# Altium PCB AdaptiveLightingHub.PcbDoc
Units mil, origin at the board's own origin, x right, y up, seen from the top; angles counter-clockwise.
Board outline 1759.84 x 1515.75 mil, 2 copper layers (Top Layer, Bottom Layer); 34 components, 26 nets, 167 pads, 148 vias.
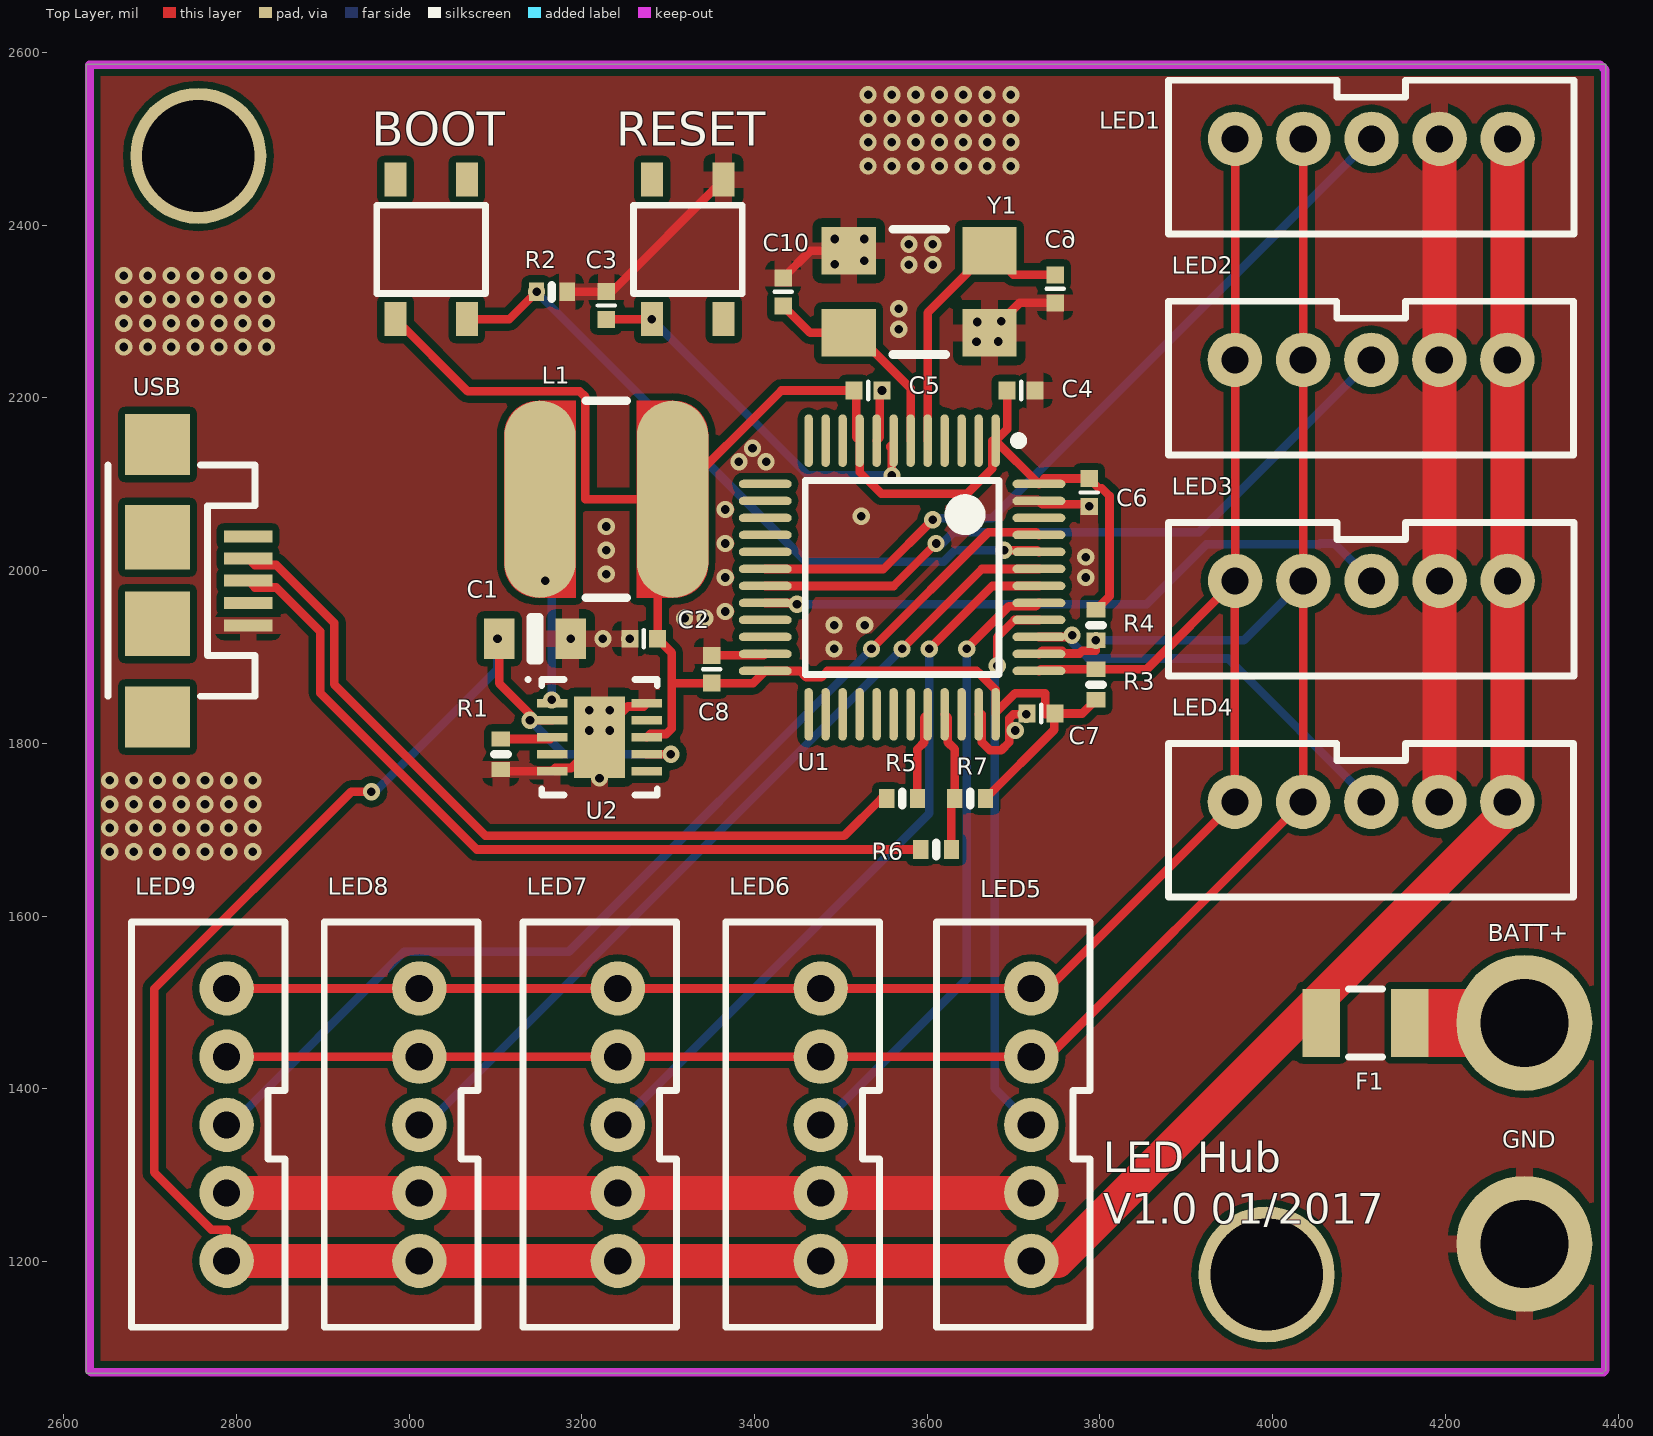
[diagram p0: Top Layer view]
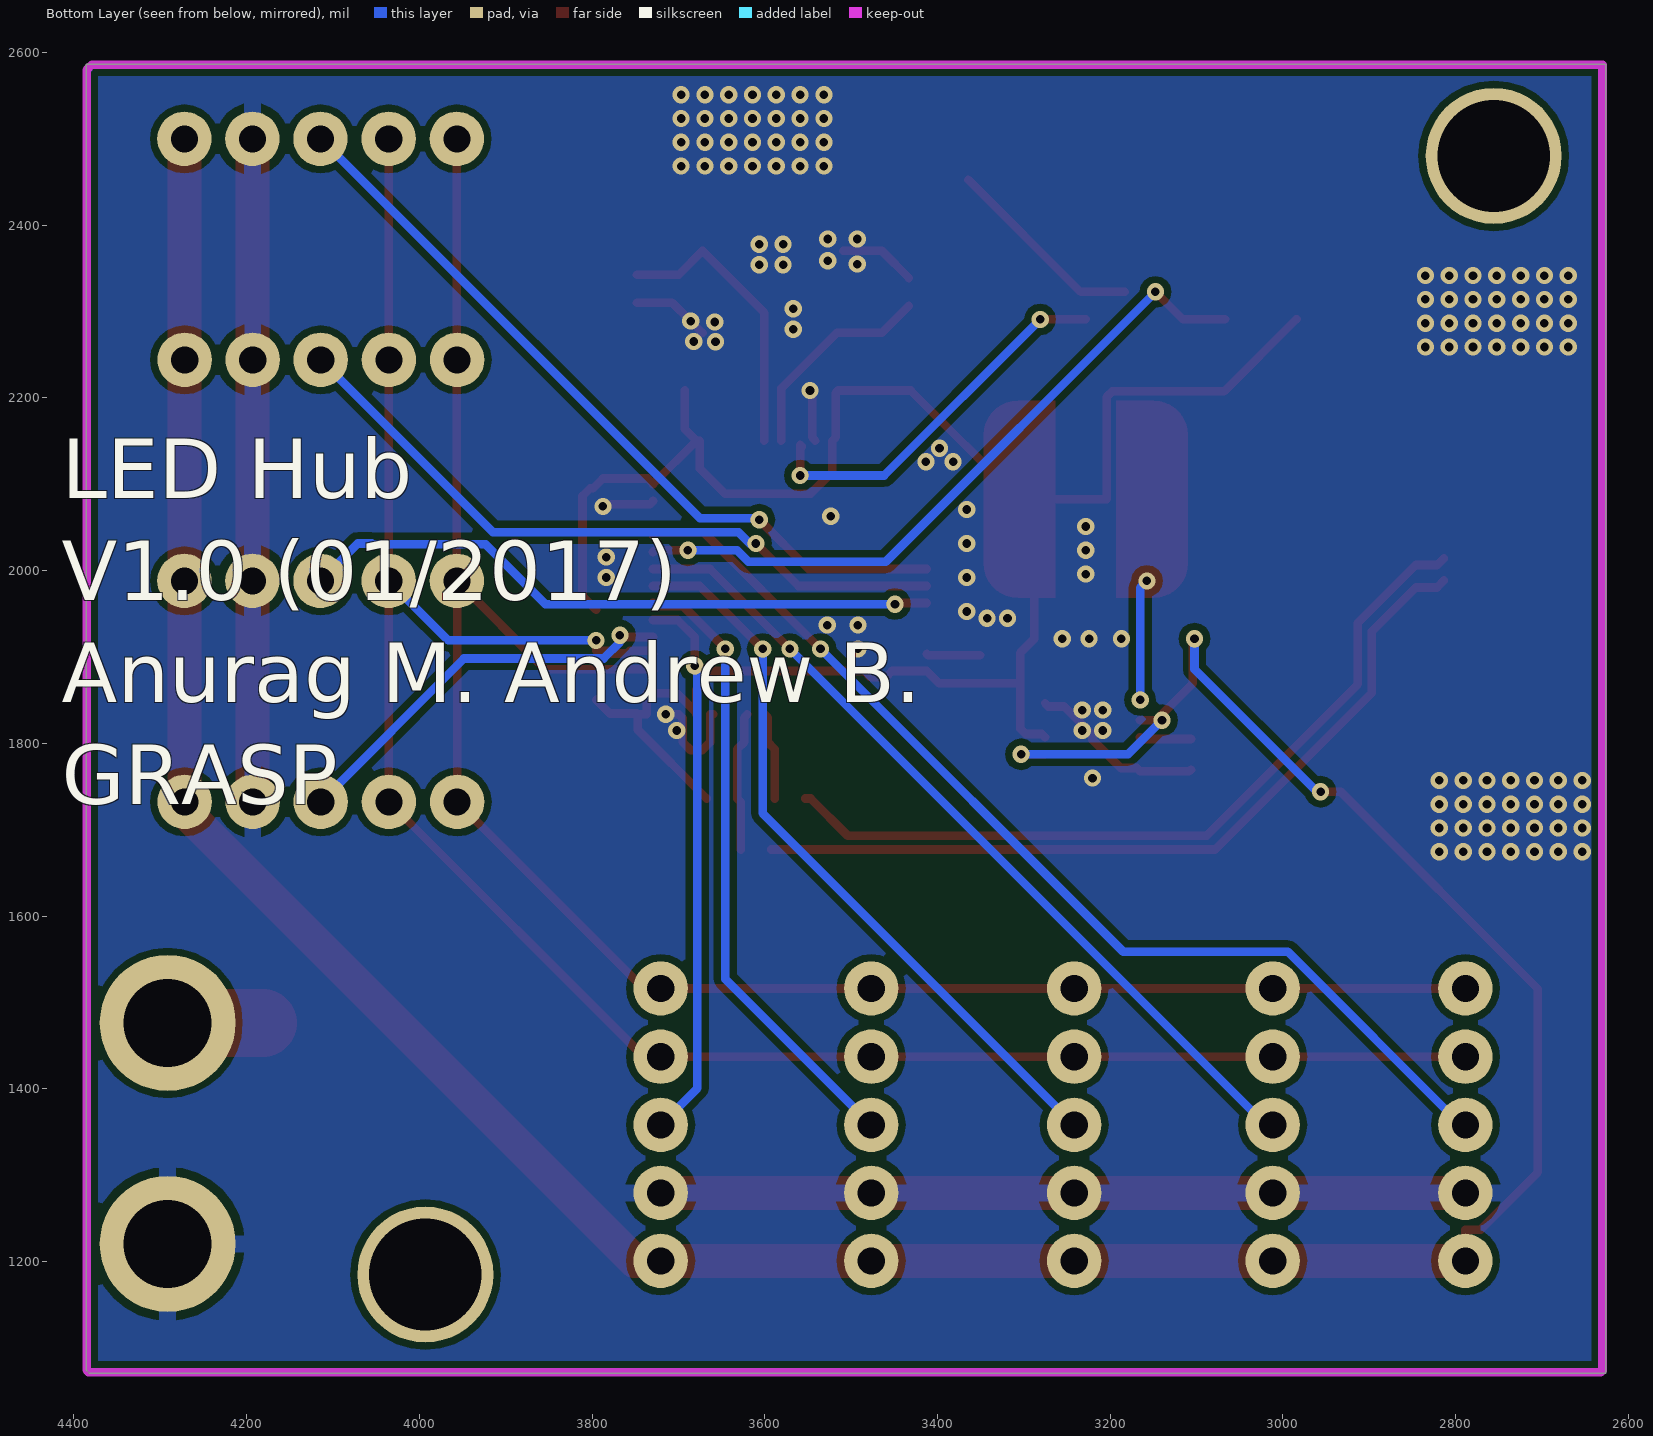
[diagram p1: Bottom Layer view, seen from below]
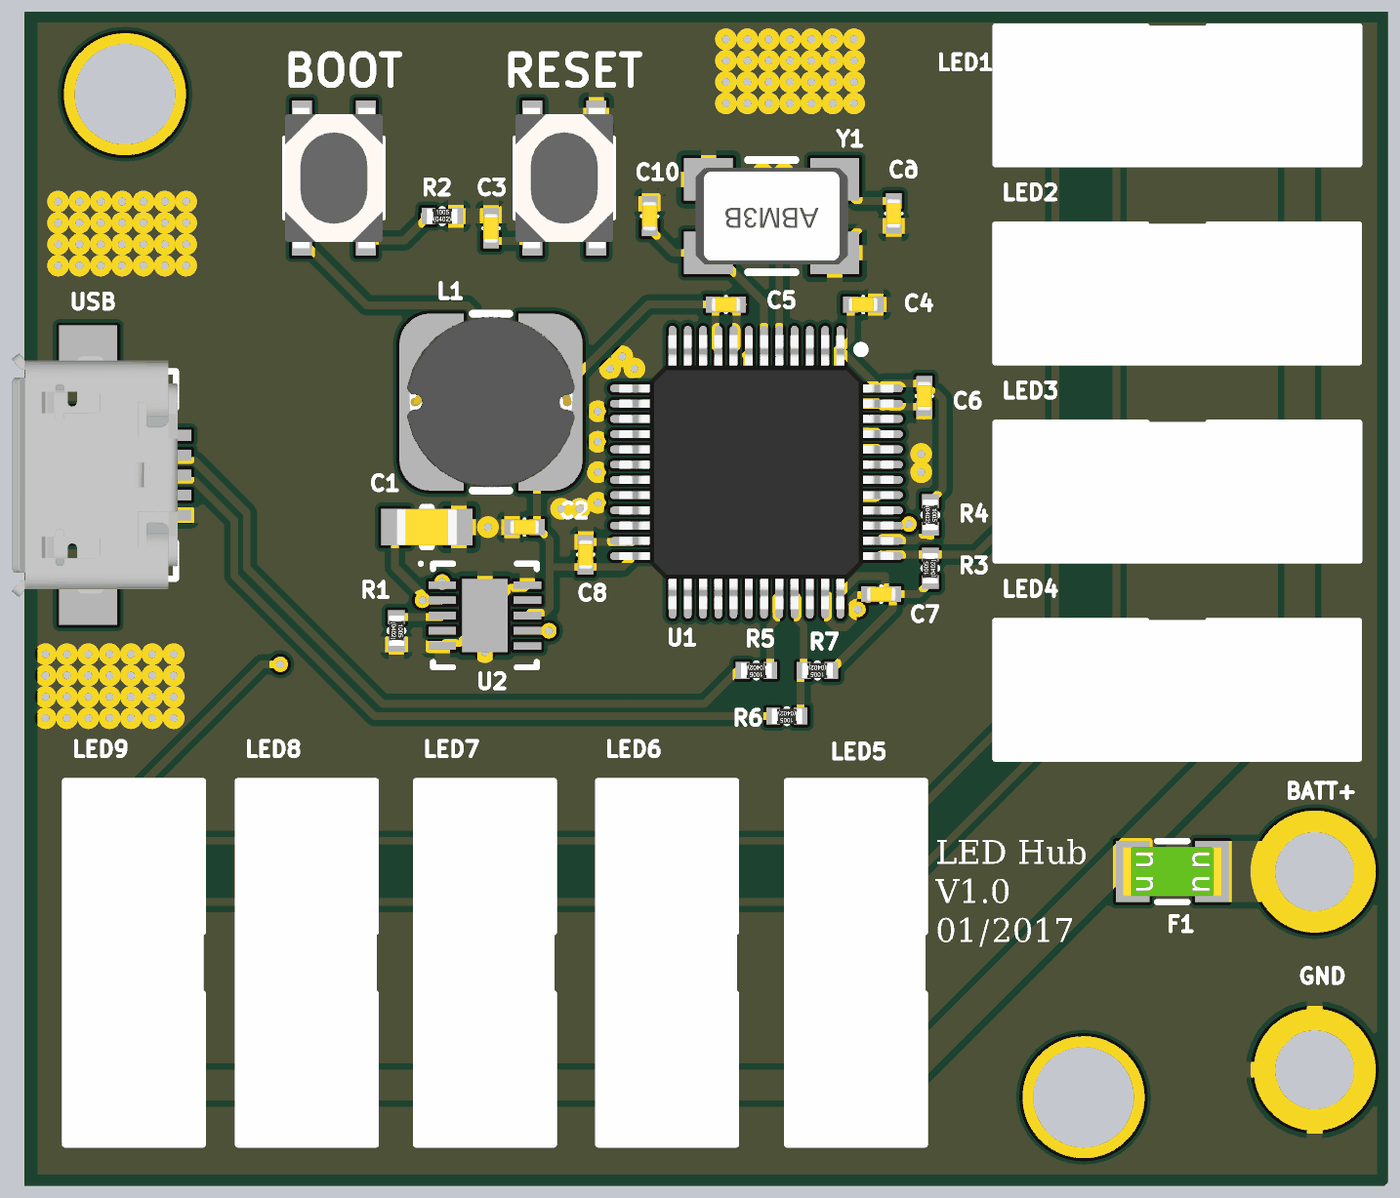
[diagram p2: 3D render of the assembled board from above, using the file's embedded part models]

## Layer stack, top to bottom
Top Solder: solder mask 0.4, Solder Resist, Dk 3.5
Top Layer: signal copper 1.4
Dielectric 1: dielectric 12.6, FR-4, Dk 4.8
Bottom Layer: signal copper 1.4
Bottom Solder: solder mask 0.4, Solder Resist, Dk 3.5

## Board outline
2625.98,2586.61 4385.83,2586.61 4385.83,1074.8 4381.89,1070.87 2625.98,1070.87

## Design rules (kind name [scope] priority, off if disabled: settings)
Clearance [All] p1: gap=6 ignorepadtopadclearanceinfootprint=FALSE
PolygonConnect PolygonConnect_1 [IsVia] p1: connectstyle=Direct reliefconductorwidth=10 reliefentries=4 polygonreliefangle="90 Angle" airgapwidth=10
PolygonConnect [All] p2: connectstyle=Relief reliefconductorwidth=20 reliefentries=4 polygonreliefangle="90 Angle" airgapwidth=10
RoutingVias [All] p1: holewidth=10 width=20 viastyle="Through Hole" minholewidth=10 minwidth=20 maxholewidth=10 maxwidth=20
SolderMaskExpansion SolderMaskExpansion_1 [IsVia] p1: expansion=1 soldermaskfromhole=TRUE
SolderMaskExpansion [All] p2: expansion=4
Width Width_BATT+ [InNet('BATT+')] p1: maxlimit=39.37 minlimit=10 preferedwidth=10
Width Width_1 [All] p2: maxlimit=78.74 minlimit=10 preferedwidth=10
30 further rules are at their usual default settings.

## Components (designator, comment, footprint, x,y, rotation, side; value= is the part's Value field where it differs from the comment)
BOOT "" SWITCH 3025.59,2372.05 r270 top
C1 "1uF" C0805[2012X120] 3145.67,1921.26 r180 top
C2 "10uF 6.3V 0402" C0402[1005X55] 3271.65,1921.26 r0 top value=10uF
C3 "0.1uF 6.3V 0402" C0402[1005X55] 3228.35,2307.09 r90 top value=0.1uF
C4 "4.7uF 6.3V 0402" C0402[1005X55] 3708.66,2208.66 r180 top value=4.7uF
C5 "2.2uF 6.3V 0402" C0402[1005X55] 3531.5,2208.66 r180 top value=2.2uF
C6 "2.2uF 6.3V 0402" C0402[1005X55] 3787.4,2090.55 r90 top value=2.2uF
C7 "2.2uF 6.3V 0402" C0402[1005X55] 3731.89,1834.65 r0 top value=2.2uF
C8 "2.2uF 6.3V 0402" C0402[1005X55] 3350.39,1885.83 r270 top value=2.2uF
C9 "15pF 50V 0402" C0402[1005X55] 3748.03,2326.38 r90 top value=15pF
C10 "15pF 50V 0402" C0402[1005X55] 3433.07,2322.83 r270 top value=15pF
F1 "FUSE 1206" 1206_FUSE 4107.5,1476.38 r180 top
L1 "SDR0604-470KL" SDR0604 3228.35,2082.68 r0 top value=47uH
LED1 "JST_PH_5_VERT" JST-PH-5-PTH-VERT 4114.43,2500 r180 top (schematic designator JP1)
LED2 "JST_PH_5_VERT" JST-PH-5-PTH-VERT 4114.17,2244.09 r180 top (schematic designator JP2)
LED3 "JST_PH_5_VERT" JST-PH-5-PTH-VERT 4114.43,1988.19 r180 top (schematic designator JP3)
LED4 "JST_PH_5_VERT" JST-PH-5-PTH-VERT 4114.17,1732.28 r180 top (schematic designator JP4)
LED5 "JST_PH_5_VERT" JST-PH-5-PTH-VERT 3720.47,1358.27 r90 top (schematic designator JP5)
LED6 "JST_PH_5_VERT" JST-PH-5-PTH-VERT 3476.69,1358.27 r90 top (schematic designator JP6)
LED7 "JST_PH_5_VERT" JST-PH-5-PTH-VERT 3241.69,1358.27 r90 top (schematic designator JP7)
LED8 "JST_PH_5_VERT" JST-PH-5-PTH-VERT 3011.81,1358.27 r90 top (schematic designator JP8)
LED9 "JST_PH_5_VERT" JST-PH-5-PTH-VERT 2788.64,1358.27 r90 top (schematic designator JP9)
R1 "56K2 1% 0402" R0402[1005] 3106.3,1787.4 r270 top value=56K2
R2 "10K 1% 0402" R0402[1005] 3165.35,2322.83 r0 top value=10K
R3 "2K2 1% 0402" R0402[1005] 3795.28,1868.11 r90 top value=2K2
R4 "2K2 1% 0402" R0402[1005] 3795.28,1937.01 r270 top value=2K2
R5 "22R 1% 0402" R0402[1005] 3570.87,1736.22 r180 top value=22R
R6 "22R 1% 0402" R0402[1005] 3610.24,1677.17 r180 top value=22R
R7 "1K5 1% 0402" R0402[1005] 3649.61,1736.22 r180 top value=1K5
RESET "" SWITCH 3322.83,2372.05 r90 top
U1 "STM32F303CBT6" LQFP-48 3570.87,1992.13 r270 top
U2 "LM5165YDRCR" "VSON-10 (3mmx3mm)" 3220.47,1807.09 r0 top
USB "USB" USB-MICROB 2708.66,1988.6 r270 top (schematic designator JP10)
Y1 "8MHz, 10pF" ABRA-ABM3B-4_V 3590.55,2322.83 r180 top

## Footprints (in the part's own frame and the unit in brackets; to place one, negate y for a bottom-side part, rotate by r counter-clockwise, add the part's x,y. Pads: shape width x height; smd on the part's side, far side on the other; paste and mask are expansions set on the pad)
1206_FUSE [mm]
  rect 1.1x2 smd: 1(-1.3,0) 2(1.3,0)
  silkscreen extent -0.5,-1 0.5,1, body extent -1.61,-0.8 1.61,0.8, height 0.67
ABRA-ABM3B-4_V [mil] "SMT Crystal, 4-Leads, Body 5.2x3.4mm"
  rect 63x55 smd: 1(-81.5,-47.5) 2(-81.5,47.5) 2(81.5,-47.5) 3(81.5,47.5)
  silkscreen extent -31,-72 31,73, body extent -98,-62 98,63, height 43
C0402[1005X55] [mm] "Chip Capacitor, Body 1.0x0.5mm"
  rect 0.5x0.52 smd: 1(-0.41,0) 2(0.41,0)
  silkscreen extent 0,-0.25 0,0.25, body extent -0.5,-0.25 0.5,0.25, height 0.56
C0805[2012X120] [mm] "Chip Capacitor, Body 2.0x1.25mm"
  rect 0.9x1.2 smd: 1(-1.05,0) 2(1.05,0)
  silkscreen extent -0.13,-0.63 0.13,0.64, body extent -1,-0.6 1,0.6, height 1.21
JST-PH-5-PTH-VERT [mil]
  round 63 hole 31.5: 1(-157.48,0) 2(-78.74,0) 3(0,0) 4(79,0) 5(158,0)
  silkscreen extent -234,-68 235,110, body extent -236,-69 232,108, height 236
LQFP-48 [mm] "QFP, 48-Leads, Body 7x7mm, Pitch 0.5mm, IPC High Density"
  oval 1.55x0.25 smd: 1(-4.025,2.75) 2(-4.025,2.25) 3(-4.025,1.75) 4(-4.025,1.25) 5(-4.025,0.75) 6(-4.025,0.25) 7(-4.025,-0.25) 8(-4.025,-0.75) 9(-4.025,-1.25) 10(-4.025,-1.75) 11(-4.025,-2.25) 12(-4.025,-2.75) 25(4.025,-2.75) 26(4.025,-2.25) 27(4.025,-1.75) 28(4.025,-1.25) 29(4.025,-0.75) 30(4.025,-0.25) 31(4.025,0.25) 32(4.025,0.75) 33(4.025,1.25) 34(4.025,1.75) 35(4.025,2.25) 36(4.025,2.75)
  oval 0.25x1.55 smd: 13(-2.75,-4.025) 14(-2.25,-4.025) 15(-1.75,-4.025) 16(-1.25,-4.025) 17(-0.75,-4.025) 18(-0.25,-4.025) 19(0.25,-4.025) 20(0.75,-4.025) 21(1.25,-4.025) 22(1.75,-4.025) 23(2.25,-4.025) 24(2.75,-4.025) 37(2.75,4.025) 38(2.25,4.025) 39(1.75,4.025) 40(1.25,4.025) 41(0.75,4.025) 42(0.25,4.025) 43(-0.25,4.025) 44(-0.75,4.025) 45(-1.25,4.025) 46(-1.75,4.025) 47(-2.25,4.025) 48(-2.75,4.025)
  silkscreen extent -4.15,-2.85 2.85,3.55, body extent -4.5,-4.5 4.5,4.5, height 1.6
R0402[1005] [mm] "Chip Resistor, Body 1.0x0.5mm"
  rect 0.45x0.55 smd: 1(-0.45,0) 2(0.45,0)
  silkscreen extent 0,-0.2 0,0.2, body extent -0.5,-0.25 0.5,0.25, height 0.35
SDR0604 [mm]
  rrect100% 2.1x5.8 smd: 1(-1.95,0) 2(1.95,0)
  Top Layer region: -2,2.9 -0.9,2.9 -0.9,-2.9 -2,-2.9 -2.5,-2.766 -2.866,-2.4 -3,-1.9 -3,-1.9 -3,1.9 -2.866,2.4 -2.5,2.766 -2,2.9
  Top Layer region: 2,2.9 0.9,2.9 0.9,-2.9 2,-2.9 2.5,-2.766 2.866,-2.4 3,-1.9 3,-1.9 3,1.9 2.866,2.4 2.5,2.766 2,2.9
  silkscreen extent -0.6,-2.9 0.6,2.9, body extent -2.75,-2.8 2.75,2.8, height 4.55
SWITCH [mm]
  rect 1x0.65 smd: 1(-2.05,1.05) 2(2.05,1.05) 3(-2.05,-1.05) 4(2.05,-1.05)
  silkscreen extent -1.3,-1.6 1.3,1.6, body extent -2.3,-1.6 2.3,1.6, height 2.5
USB-MICROB [mil]
  rect 14x56 smd: D+(0,105) D-(-25.59,105) GND(52,105) ID(26,105) VBUS(-51.18,105)
  rect 71x75 smd: MT1(-157.48,0) MT2(158,0)
  rect 75x75 smd: P$1(-50,0) P$2(50,0)
  silkscreen extent -134,-57 134,113, body extent -157,-98 157,115, height 112
"VSON-10 (3mmx3mm)" [mm] "VSON, 10-Leads, Body 3.00x3.00mm, Pitch 0.50mm, Thermal Pad 2.40x1.49mm, IPC Medium Density"
  rect 0.9x0.25 smd: 1(-1.395,1) 2(-1.395,0.5) 3(-1.395,0) 4(-1.395,-0.5) 5(-1.395,-1) 6(1.395,-1) 7(1.395,-0.5) 8(1.395,0) 9(1.395,0.5) 10(1.395,1)
  rect 1.49x2.4 smd: 11(0,0)
  silkscreen extent -2.15,-1.7 1.7,1.75, body extent -1.55,-1.55 1.55,1.55, height 1

## Part data
BOOT RESET: library part DIPT-DTSM-6, "Switch, SPNO Push Button SMD", Manufacturer="C&K Components", PartNumber="PTS810 SJM 250 SMTR LFS", ComponentLink1Description="Manufacturer URL", ComponentLink1URL=http://www.dip.com.tw/, ComponentLink2Description=Datasheet, ComponentLink2URL=http://www.dip.com.tw/Products_tact.htm, ComponentLink3Description="Package Specification", ComponentLink3URL=http://www.dip.com.tw/PDF/pro_tact/DTSM_G_-6_2_-V.pdf, Mechanical Life="200,000 cycles", Mounting Technology="Surface Mount", PackageDescription="Switch, Surface Mount, 4 Leads, Body 4.6x2.8mm, Height 1.9mm", PackageReference=PTS810, Packing Type=Tape&Reel
C1: library part CAP_1uF_100V_0805_20%, "CAP_1uF 100V 20% 0805 (2012 metric)", Manufacturer=TDK, Package Description="0805 (2012 Metric)", Package Reference=0805, PartNumber=C2012X7S2A474M125AE, Tolerance=20%, Voltage=100V, Mounting Technology="Surface Mount"
C2: library part CAP_10uF_6.3V_0402_20%, "10uF 6.3V 20% 0402 (1005 Metric)", Manufacturer=Murata, PartNumber=GRM155R60J106ME44D, Tolerance=20%, Voltage=6.3V, Mounting Technology="Surface Mount", PackageDescription="0402 (1005 Metric)", PackageReference=0402
C3: library part CAP_0.1uF_6.3V_0402_10%, "0.1uF 6.3V 10% 0402 (1005 Metric)", Manufacturer=Murata, PartNumber=GRM155R70J104KA01D, Tolerance=10%, Voltage=6.3V, Mounting Technology="Surface Mount", PackageDescription="0402 (1005 Metric)", PackageReference=0402
C4: library part CAP_4.7uF_6.3V_0402_20%, "4.7uF 6.3V 20% 0402 (1005 Metric)", Manufacturer=Murata, PartNumber=GRM155R60J475ME47D, Tolerance=20%, Voltage=6.3V, Mounting Technology="Surface Mount", PackageDescription="0402 (1005 Metric)", PackageReference=0402
C5 C6 C7 C8: library part CAP_2.2uF_6.3V_0402_20%, "2.2uF 6.3V 20% 0402 (1005 Metric)", Manufacturer=Murata, PartNumber=GRM155R60J225ME15D, Tolerance=20%, Voltage=6.3V, Mounting Technology="Surface Mount", PackageDescription="0402 (1005 Metric)", PackageReference=0402
C9 C10: library part CAP_15pF_50V_0402_5%, "15pF 50V 5% 0402 (1005 Metric)", Manufacturer=Murata, PartNumber=GRM1555C1H150JA01D, Tolerance=5%, Voltage=50V, Mounting Technology="Surface Mount", PackageDescription="0402 (1005 Metric)", PackageReference=0402
F1: "Surface Mount Fuses UST 1206 FUSE 25A F", Current=25A, Manufacturer=Schurter, PartNumber=3413.0332.22, Mounting Technology="Surface Mount", PackageDescription="1206 (3216 Metric)", PackageReference=1206
L1: "47uH 10% 0.72A 0604", Current=0.72A, Manufacturer=Bourns, Mounting Technology="Surface Mount", PackageReference=SDR0604, PartNumber=SDR0604-470KL
LED1 LED2 LED3 LED4 LED5 LED6 LED7 LED8 LED9: Manufacturer="JST Sales America, Inc.", PartNumber=B5B-PH-K-S(LF)(SN), Mounting Technology="Through Hole", PackageReference=JST-PH
R1: library part RES_56K2_0402_1%, "56K2 0.063W 1% 0402 (1005 Metric)", Manufacturer="KOA Speer", PartNumber=RK73H1ETTP5622F, Power=0.063W, Tolerance=1%, ComponentLink1Description=Datasheet, ComponentLink1URL=http://www.koaspeer.com/catimages/Products/RK73H/RK73H.pdf, Mounting Technology="Surface Mount", PackageDescription="0402 (1005 Metric)", PackageReference=0402
R2: library part RES_10K_0402_1%, "10K 0.063W 1% 0402 (1005 Metric)", Manufacturer="KOA Speer", PartNumber=RK73H1ETTP1002F, Power=0.063W, Tolerance=1%, ComponentLink1Description=Datasheet, ComponentLink1URL=http://www.koaspeer.com/catimages/Products/RK73H/RK73H.pdf, Mounting Technology="Surface Mount", PackageDescription="0402 (1005 Metric)", PackageReference=0402
R3 R4: library part RES_2K2_0402_1%, "2K2 0.063W 1% 0402 (1005 Metric)", Manufacturer="KOA Speer", PartNumber=RK73H1ETTP2201F, Power=0.063W, Tolerance=1%, ComponentLink1Description=Datasheet, ComponentLink1URL=http://www.koaspeer.com/catimages/Products/RK73H/RK73H.pdf, Mounting Technology="Surface Mount", PackageDescription="0402 (1005 Metric)", PackageReference=0402
R5 R6: library part RES_22R_0402_1%, "22R 0.063W 1% 0402 (1005 Metric)", Manufacturer="KOA Speer", PartNumber=RK73H1ETTP22R0F, Power=0.063W, Tolerance=1%, ComponentLink1Description=Datasheet, ComponentLink1URL=http://www.koaspeer.com/catimages/Products/RK73H/RK73H.pdf, Mounting Technology="Surface Mount", PackageDescription="0402 (1005 Metric)", PackageReference=0402
R7: library part RES_1K5_0402_1%, "1K5 0.063W 1% 0402 (1005 Metric)", Manufacturer="KOA Speer", PartNumber=RK73H1ETTP1501F, Power=0.063W, Tolerance=1%, ComponentLink1Description=Datasheet, ComponentLink1URL=http://www.koaspeer.com/catimages/Products/RK73H/RK73H.pdf, Mounting Technology="Surface Mount", PackageDescription="0402 (1005 Metric)", PackageReference=0402
U1: Manufacturer=STMicroelectronics, Mounting Technology="Surface Mount", PackageDescription="QFP, 48-Leads, Body 7x7mm, Pitch 0.5mm", PackageReference=LQFP-48, PartNumber=STM32F303CBT6
U2: "LM5165 3-V to 65-V Input, 150-mA Synchronous Buck Converter", Manufacturer="Texas Instruments", Mounting Technology="Surface Mount", PackageReference=VSON-10, PartNumber=LM5165YDRCR
USB: library part USB_MICROB_SMT, Manufacturer="Amphenol FCI", PartNumber=10118192-0001LF, Mounting Technology="Surface Mount", PackageReference="USB - Micro B"
Y1: library part ABRA-ABM3B-4, Manufacturer=ABRACON, PartNumber=ABM3B-8.000MHZ-10-1UT, Mounting Technology="Surface Mount", PackageDescription="2012 (5032 metric)", PackageReference=2012

## Free pads (board coordinates)
  round 157.48 hole 129.92: 2(2755.91,2480.32) 2(3993,1185)
  round 157.48 hole 101.97: 3(4291.34,1220.47) 3(4291.34,1476.38)

## Via types
v1: diameter 20, hole 10, Top Layer to Bottom Layer, 148 vias

## Nets (pads, with @x,y where several pads share a name; then routed paths per layer and width w, separated by ;. In a path a pad name is that pad's centre, name@x,y a point inside that pad or via, vN(x,y) a via of type N, cw(c..) or ccw(c..) an arc to the next point about the centre after c; other vN are vias at no path point)
3V3: BOOT.4 C2.2 C4.2 C5.2 C6.2 C7.2 C8.2 L1.2 R3.1 R4.1 R7.1 U1.1 U1.9 U1.24 U1.36 U1.48 U2.8 | length 2438.2
  Top Layer w10: BOOT.4 3067.74,2207.85 3197.47,2207.85 3203.91,2201.41 3203.91,2082.68 L1.2 ; U2.8 3279.16,1810.85 3297.67,1810.85 3304.11,1817.3 3304.11,1870.08 ; R7.1 3747.05,1815.95 C7.2@3747.05,1833.66 ; U1.36 U1.36@3679.13,1835.62 ; C4.2 3692.52,2163.98 U1.1 ; R4.1 3811.02,1970.47 3811.02,2086.42 3802.19,2095.25 3798.84,2095.25 C6.2 3735.63,2106.69 U1.48 U1.1 ; R3.1 3779.53,1834.65 C7.2 C7.2@3747.05,1833.66 ; 3304.11,1870.08 3304.11,1904.94 C2.2 3287.79,2065.35 L1.2 ; 3304.11,1870.08 3304.5,1869.69 C8.2 3398.23,1869.69 U1.24 3452.59,1883.86 3459.81,1876.64 3477.2,1876.64 3484.42,1883.86 3657.36,1883.86 3660.09,1881.12 3666.04,1875.17 3679.13,1862.08 U1.36@3679.13,1835.62 ; L1.2 3431.1,2208.66 C5.2 3517.89,2206.13 3517.89,2154.35 U1.9 3521.65,2114.17 3546.59,2089.24 3646.2,2089.24 3675.37,2118.4 3675.37,2150.59 U1.1 ; U1.36@3679.13,1835.62 3701.78,1858.27 3736.59,1858.27 3736.59,1833.66 C7.2@3747.05,1833.66
BATT+: C1.2 F1.2 LED1.1 LED2.1 LED3.1 LED4.1 LED5.1 LED6.1 LED7.1 LED8.1 LED9.1 U2.2 U2.7 | length 3765.7
  Top Layer w10: LED9.1 2788.64,1237.03 2771.04,1237.03 2704.72,1303.34 2704.72,1515.75 2933.07,1744.09 v1(2956.36,1744.09) ; C1.2 3104.33,1869.48 3139.97,1833.84 v1(3139.97,1826.77) U2.2@3165.55,1826.77 ; U2.7 v1(3303.14,1787.4)
  Top Layer w39.37: LED9.1 LED8.1 LED7.1 LED6.1 LED5.1 3750.79,1200.79 4271.91,1721.91 LED3.1 LED1.1
  Bottom Layer w10: v1(2956.36,1744.09) 2960.63,1744.09 3102.36,1885.83 v1(3102.36,1921.26) ; v1(3139.97,1826.77) 3179.34,1787.4 v1(3303.14,1787.4)
DM: R5.2 USB.D- | length 932
  Top Layer w10: USB.D- 2821.25,2006.6 2846.22,2006.6 2913.15,1939.67 2913.15,1868.39 3088.37,1693.17 3503.94,1693.17 3546.99,1736.22 R5.2@3553.15,1736.22
DP: R6.2 USB.D+ | length 949.6
  Top Layer w10: USB.D+ 2821.66,1980.6 2846.22,1980.6 2897.15,1929.67 2897.15,1858.39 3078.37,1677.17 R6.2
EN1: LED1.3 U1.18 | length 908.3
  Top Layer w10: U1.18 3549.21,2001.97 v1(3606.3,2059.06)
  Bottom Layer w10: v1(3606.3,2059.06) 3607.87,2060.62 3675.06,2060.62 LED1.3
EN2: LED2.3 U1.19 | length 810.2
  Top Layer w10: U1.19 3561.02,1982.28 v1(3610.24,2031.5)
  Bottom Layer w10: v1(3610.24,2031.5) 3617.31,2031.5 3630.43,2044.62 3914.7,2044.62 LED2.3
EN3: LED3.3 U1.20 | length 749.6
  Top Layer w10: U1.20 3442.91,1962.6 3444.23,1961.28 v1(3449.21,1961.28)
  Bottom Layer w10: v1(3449.21,1961.28) 3853.99,1961.28 3923.4,2030.69 4054.31,2030.69 4055.12,2031.5 4071.13,2031.5 LED3.3
EN4: LED4.3 U1.39 | length 470.3
  Top Layer w10: U1.39 3765.74,1923.23 v1(3767.71,1925.19)
  Bottom Layer w10: v1(3767.71,1925.19) 3767.71,1917.16 3786.58,1898.29 3948.17,1898.29 LED4.3
EN5: LED5.3 U1.40 | length 640.2
  Top Layer w10: v1(3681.12,1889.79) 3681.12,1923.13 3700.91,1942.91 U1.40
  Bottom Layer w10: v1(3681.12,1889.79) 3677.97,1886.64 3677.97,1400.77 LED5.3
EN6: LED6.3 U1.41 | length 727.3
  Top Layer w10: v1(3645.67,1909.45) 3645.67,1910.3 3694.28,1958.91 3725.65,1958.91 U1.41
  Bottom Layer w10: LED6.3 3645.67,1527.24 v1(3645.67,1909.45)
EN7: LED7.3 U1.42 | length 857.7
  Top Layer w10: v1(3602.36,1909.45) 3675.2,1982.28 U1.42
  Bottom Layer w10: LED7.3 3602.36,1718.94 v1(3602.36,1909.45)
EN8: LED8.3 U1.43 | length 984.1
  Top Layer w10: v1(3570.87,1909.45) 3663.39,2001.97 U1.43
  Bottom Layer w10: LED8.3 3019.69,1358.27 v1(3570.87,1909.45)
EN9: LED9.3 U1.45 | length 1226.3
  Top Layer w10: v1(3535.43,1909.45) 3670.61,2044.62 3726.05,2044.62 U1.45
  Bottom Layer w10: LED9.3 2793.71,1358.27 2994.21,1558.77 3184.75,1558.77 v1(3535.43,1909.45)
GND: C1.1 C2.1 C3.2 C4.1 C5.1 C6.1 C7.1 C8.1 C9.1 C10.1 LED1.2 LED2.2 LED3.2 LED4.2 LED5.2 LED6.2 LED7.2 LED8.2 LED9.2 pad.3@4291.34,1220.47 R1.2 R2.2 RESET.4 U1.8 U1.23 U1.35 U1.47 U2.5 U2.10 U2.11 USB.GND Y1.2 | length 2631.5
  Top Layer w10: R1.2 3108.27,1767.72 U2.5 3169.32,1771.48 3187.82,1771.48 3220.47,1804.13 U2.11 3220.47,1810.05 3253.12,1842.69 3271.63,1842.69 U2.10 ; R2.2 3234.25,2322.83 RESET.4 ; C8.1 3410.83,1901.97 U1.23 ; C10.1 3464.43,2370.33 Y1.2@3509.05,2370.33 ; U1.8 3545.1,2154.35 3545.1,2206.13 v1(3547.64,2208.66) ; U1.35 3663.13,1833.66 3663.13,1801.56 3672.54,1792.15 3685.73,1792.15 3695.13,1801.56 3695.13,1829 3699.8,1833.66 v1(3714.76,1833.66) C7.1 ; Y1.2@3672.05,2275.33 v1(3685.72,2289) 3706.95,2310.24 C9.1 ; U1.47 3733.09,2076.95 3787.4,2076.95 v1(3787.4,2074.41) ; LED4.2 LED4.2@4193.17,1732.54
  Top Layer w39.37: LED9.2 LED8.2 LED7.2 LED6.2 LED5.2 ; LED4.2@4193.17,1732.54 LED3.2 LED1.2
  other v1: 2653.5,1674.5 2681.06,1674.5 2708.61,1674.5 2736.17,1674.5 2763.73,1674.5 2791.29,1674.5 2818.85,1674.5 2653.5,1702.06 2681.06,1702.06 2708.61,1702.06 2736.17,1702.06 2763.73,1702.06 2791.29,1702.06 2818.85,1702.06 2653.5,1729.62 2681.06,1729.62 2708.61,1729.62 2736.17,1729.62 2763.73,1729.62 2791.29,1729.62 2818.85,1729.62 2653.5,1757.18 2681.06,1757.18 2708.61,1757.18 2736.17,1757.18 2763.73,1757.18 2791.29,1757.18 2818.85,1757.18 3220.47,1759.84 3208.66,1814.96 3232.28,1814.96 3702,1814.99 3208.66,1838.58 3232.28,1838.58 3492.13,1909.45 3187.01,1921.26 3224.41,1921.26 3255.51,1921.26 3492.13,1937.01 3527.56,1937.01 3318.9,1944.88 3342.52,1944.88 3366.14,1952.76 3366.14,1992.13 3783.46,1992.13 3228.35,1996.06 3783.46,2015.75 3228.35,2023.62 3366.14,2031.5 3228.35,2051.18 3523.62,2062.99 3366.14,2070.87 3381.89,2125.98 3413.39,2125.98 3397.64,2141.73 2669.65,2259 2697.2,2259 2724.76,2259 2752.32,2259 2779.88,2259 2807.44,2259 2835,2259 3657,2265 3682.05,2265.33 3566.93,2279.53 2669.65,2286.56 2697.2,2286.56 2724.76,2286.56 2752.32,2286.56 2779.88,2286.56 2807.44,2286.56 2835,2286.56 3658,2288 3566.93,2303.15 2669.65,2314.12 2697.2,2314.12 2724.76,2314.12 2752.32,2314.12 2779.88,2314.12 2807.44,2314.12 2835,2314.12 2669.65,2341.68 2697.2,2341.68 2724.76,2341.68 2752.32,2341.68 2779.88,2341.68 2807.44,2341.68 2835,2341.68 3578.74,2354.33 3606.3,2354.33 3493,2355 3527,2359 3578.74,2377.95 3606.3,2377.95 3493,2384 3527,2384 3531.5,2468.5 3559.06,2468.5 3586.61,2468.5 3614.17,2468.5 3641.73,2468.5 3669.29,2468.5 3696.85,2468.5 3531.5,2496.06 3559.06,2496.06 3586.61,2496.06 3614.17,2496.06 3641.73,2496.06 3669.29,2496.06 3696.85,2496.06 3531.5,2523.62 3559.06,2523.62 3586.61,2523.62 3614.17,2523.62 3641.73,2523.62 3669.29,2523.62 3696.85,2523.62 3531.5,2551.18 3559.06,2551.18 3586.61,2551.18 3614.17,2551.18 3641.73,2551.18 3669.29,2551.18 3696.85,2551.18
NetBOOT_2: BOOT.2 R2.1 U1.44 | length 811.1
  Top Layer w10: BOOT.2 3116.14,2291.34 v1(3147.64,2322.83) ; v1(3688.98,2023.62) 3727.36,2023.62 U1.44
  Bottom Layer w10: v1(3147.64,2322.83) 3459.98,2010.5 3618.93,2010.5 3632.06,2023.62 v1(3688.98,2023.62)
NetC3_1: C3.1 RESET.1 U1.7 | length 444.9
  Top Layer w10: C3.1 v1(3281.1,2290.94) RESET.1 ; U1.7@3557.26,2143.04 3557.26,2143.88 3559.06,2145.68 v1(3559.06,2110.24)
  Bottom Layer w10: v1(3281.1,2290.94) 3461.81,2110.24 v1(3559.06,2110.24)
NetC9_2: C9.2 U1.5 Y1.1 | length 336.9
  Top Layer w10: U1.5 3600.39,2298.68 Y1.1 3699.87,2342.52 C9.2
NetC10_2: C10.2 U1.6 Y1.3 | length 247.8
  Top Layer w10: C10.2 3464.43,2275.33 Y1.3 3516.6,2275.33 3580.71,2211.23 U1.6
NetL1_1: L1.1 U2.1 | length 242
  Top Layer w10: L1.1 3157.48,2076.77 v1(3157.48,1988.19) ; v1(3165.35,1850.39) 3165.35,1846.66 U2.1
  Bottom Layer w10: v1(3157.48,1988.19) 3165.35,1980.32 v1(3165.35,1850.39)
NetR1_1: R1.1 U2.3 | length 60.1
  Top Layer w10: R1.1 3163.58,1805.12 U2.3
NetR5_1: R5.1 U1.32 | length 102.3
  Top Layer w10: R5.1 3588.58,1793.43 3596.63,1801.48 3596.63,1829.9 U1.32
NetR6_1: R6.1 R7.2 U1.33 | length 163
  Top Layer w10: U1.33 3623.84,1829.9 3623.84,1801.48 3631.89,1793.43 R7.2 3627.95,1732.28 R6.1
SCL: LED1.4 LED2.4 LED3.4 LED4.4 LED5.4 LED6.4 LED7.4 LED8.4 LED9.4 R4.2 U1.38 | length 2503.6
  Top Layer w10: LED9.4@2772.52,1437.27 LED9.4 LED8.4 LED7.4 LED6.4 LED5.4 3740.16,1437.27 LED4.4 4035.43,1732.54 LED3.4 4035.17,1988.45 LED2.4 4035.43,2244.35 LED1.4 ; U1.38 3733.01,1907.23 3755.98,1907.23 3759.01,1904.19 3776.41,1904.19 3779.52,1907.31 3795.27,1907.31 v1(3795.27,1919.29)
  Bottom Layer w10: v1(3795.27,1919.29) 3966.54,1919.29 LED3.4
SDA: LED1.5 LED2.5 LED3.5 LED4.5 LED5.5 LED6.5 LED7.5 LED8.5 LED9.5 R3.2 U1.37 | length 2310.9
  Top Layer w10: LED9.5@2772.52,1516.27 LED9.5 LED8.5 LED7.5 LED6.5 LED5.5 3740.16,1516.27 LED4.5 LED3.5@3956.17,1987.93 ; U1.37 3731.3,1885.83 R3.2 3854.07,1885.83 LED3.5@3956.17,1987.93 ; LED1.5 LED3.5 LED3.5@3956.17,1987.93
V_BATT: F1.1 pad.3@4291.34,1476.38 | length 115.8
  Top Layer w10: F1.1@4177.16,1480.31 4181.1,1476.38
  Top Layer w78.74: 4181.1,1476.38 pad.3@4291.34,1476.38
VUSB: USB.VBUS
pads on no net: BOOT.1 BOOT.3 RESET.2 RESET.3 U1.2 U1.3 U1.4 U1.10 U1.11 U1.12 U1.13 U1.14 U1.15 U1.16 U1.17 U1.21 U1.22 U1.25 U1.26 U1.27 U1.28 U1.29 U1.30 U1.31 U1.34 U1.46 U2.4 U2.6 U2.9 USB.ID USB.MT1 USB.MT2 USB.P$1 USB.P$2

## Polygon pours and split planes (outlines as drawn)
GND on Bottom Layer "Bottom-GND" (solid, remove dead copper, pour order 2): 2627.38,2590.18 4383.68,2590.18 4383.28,2582.31 4383.28,1078.37 2627.38,1078.37
GND on Top Layer "Top-GND" (solid, remove dead copper, pour order 0): 2628.54,2586.61 4384.84,2586.61 4384.45,2578.74 4384.45,1074.8 2628.54,1074.8

## Keep-outs
Keep-Out Layer:
  lines w10: 2630,1074 2630,2586 4379,2586 4385,2580 4385,1074 4383,1072 2632,1072 2630,1074

## Silkscreen, mask and mechanical layers (free items; w line width, h text height)
Top Overlay:
  text "BATT+" at 4249,1571 h19.68
  text "GND" at 4266,1332 h19.68
  text "LED Hub / V1.0 01/2017" at 3804,1232 h60
Bottom Overlay:
  text "LED Hub / V1.0 (01/2017) / Anurag M. Andrew B. / GRASP" at 4414,1707 h118.11